# Altium PCB bootleg-4.PcbDoc (part 2 of 2)
Units mm, origin at the board's own origin, x right, y up, seen from the top; angles counter-clockwise.
Board outline 284.8 x 94.3 mm, 2 copper layers (Component Side, Bottom Layer), stack 1.571 mm thick; 140 components, 94 nets, 601 pads, 29 vias.
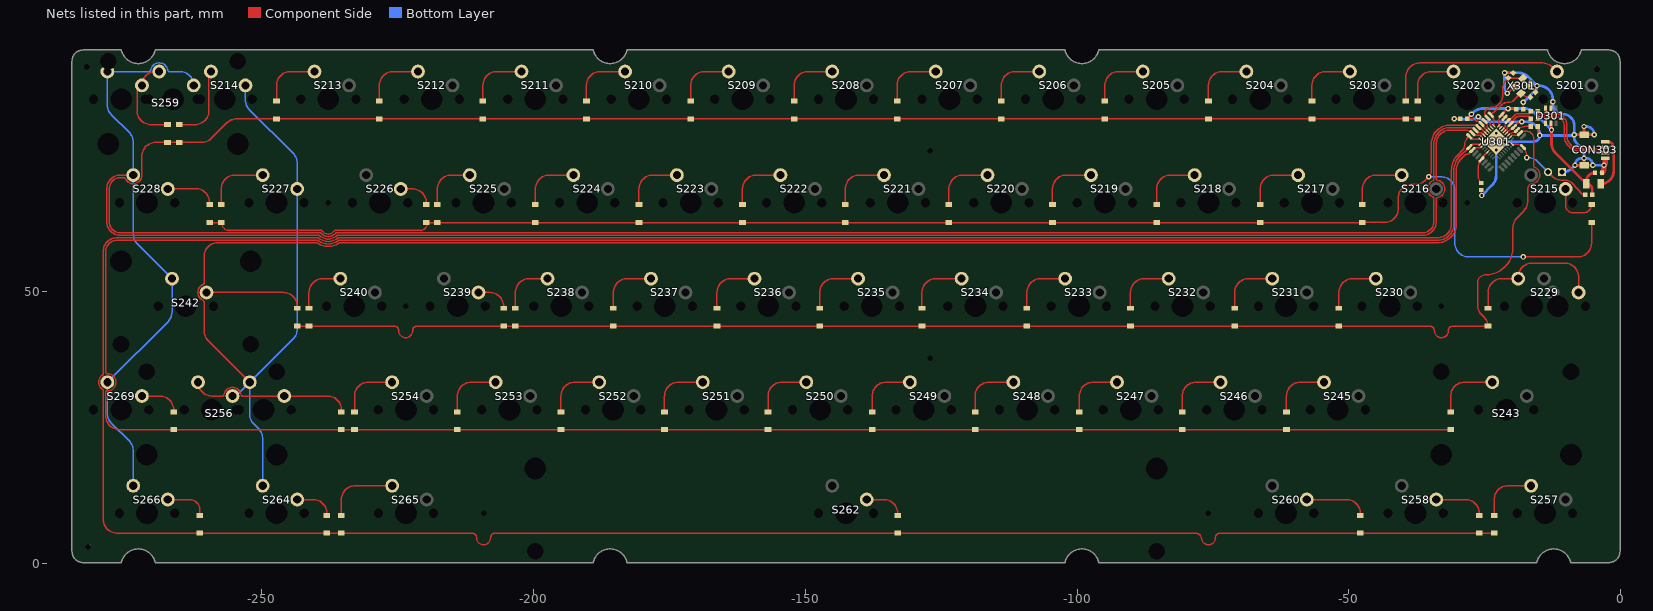
[diagram p2: the nets of this part, all layers, seen from the top]

## Via types
v1: diameter 1, hole 0.5, Component Side to Bottom Layer, tented both sides, 24 vias
v2: diameter 1, hole 0.5, Component Side to Bottom Layer, tented bottom, 5 vias

## Nets (pads, with @x,y where several pads share a name; then routed paths per layer and width w, separated by ;. In a path a pad name is that pad's centre, name@x,y a point inside that pad or via, vN(x,y) a via of type N, cw(c..) or ccw(c..) an arc to the next point about the centre after c; other vN are vias at no path point) (continued)
col14: S214.2 S227.2 S256.2 S264.2 U301.10 | length 364.4
  Component Side w0.254: S256.2@-252.195,33.345 -259.86,41.01 cw(c-258.064,42.806) -260.604,42.806 -260.604,48.148 ccw(c-260.858,48.149) -260.759,48.383 cw(c-260.14,49.855) -260.759,51.327 ccw(c-260.858,51.561) -260.604,51.562 -260.604,56.464 cw(c-258.064,56.464) -258.064,59.004 -239.936,59.004 cw(c-239.935,58.75) -239.789,58.958 ccw(c-237.75,61.865) -235.711,58.958 cw(c-235.565,58.75) -235.564,59.004 -33.655,59.004 ccw(c-33.655,62.452) -30.207,62.452 -30.207,72.357 cw(c-27.213,72.357) -29.331,74.473 -28.705,75.1 cw(c-28.194,74.589) -28.194,75.311 ccw(c-28.194,75.77) -27.869,75.446 U301.10@-27.27,76.045 -26.861,76.454 -25.8,76.454 U301.10@-25.467,76.787
  Bottom Layer w0.254: S256.2@-255.37,30.805 ccw(c-255.37,32.338) -254.286,31.254 S256.2@-252.222,33.318 ; S214.2@-252.99,87.955 -252.99,85.259 ccw(c-250.45,85.259) -252.246,83.463 -244.209,75.426 cw(c-246.005,73.63) -243.465,73.63 S227.2@-243.465,68.905 -243.465,43.132 cw(c-246.005,43.132) -244.209,41.336 S256.2@-252.2,33.345 ; S256.2@-252.222,33.345 S256.2@-252.222,33.318 ; S256.2@-252.195,33.345 S256.2@-252.222,33.318 ; S264.2@-249.809,14.295 -249.809,22.951 ccw(c-252.349,22.951) -250.553,24.747 -251.478,25.672 cw(c-249.682,27.468) -252.222,27.468 S256.2@-252.222,33.318
col15: S228.2 S242.1 S259.2 S266.2 S269.2 U301.7 | length 392.8
  Component Side w0.254: S228.2@-273.627,71.445 -275.971,71.445 ccw(c-275.971,68.905) -278.511,68.905 -278.511,62.906 ccw(c-275.971,62.906) -275.971,60.366 -239.453,60.366 cw(c-239.452,60.112) -239.275,60.294 ccw(c-237.75,61.865) -236.225,60.294 cw(c-236.048,60.112) -236.047,60.366 -36.449,60.366 ccw(c-36.449,62.906) -33.909,62.906 -33.909,66.675 -33.909,67.072 cw(c-33.655,67.072) -33.691,67.324 ccw(c-33.915,68.905) -33.691,70.486 cw(c-33.655,70.738) -33.909,70.738 -33.909,74.295 -33.909,77.176 cw(c-31.369,77.176) -31.369,79.716 -28.623,79.716 cw(c-28.623,77.803) U301.7@-27.27,79.156 -26.908,78.794 -25.835,78.794 -25.467,78.426 U301.7@-25.467,78.413
  Bottom Layer w0.254: S259.2@-278.39,90.495 -278.39,84.37 ccw(c-275.85,84.37) -277.646,82.574 -274.371,79.299 cw(c-276.167,77.503) -273.627,77.503 S228.2@-273.627,71.445 -273.627,60.585 ccw(c-271.087,60.585) -272.884,58.789 S242.1@-266.49,52.395 -266.49,46.297 cw(c-269.03,46.297) -267.234,44.501 S269.2@-278.39,33.345 -278.39,27.601 ccw(c-275.85,27.601) -277.646,25.805 -274.371,22.53 cw(c-276.167,20.734) -273.627,20.734 S266.2@-273.627,14.295 ; S259.2@-278.384,90.495 -270.694,90.495 ccw(c-270.692,90.749) -270.691,90.495 ccw(c-270.692,90.749) -270.441,90.714 cw(c-268.859,90.495) -267.277,90.714 ccw(c-267.026,90.749) -267.026,90.495 -265.049,90.495 cw(c-265.049,87.955) S259.2@-262.509,87.955
D_N: CON303.2 D301.3 R305.2 | length 18.4
  Component Side w0.254: R305.2@-15.225,83.185 ccw(c-14.666,83.185) -14.666,82.626 -13.843,82.626 ; D301.3@-13.777,83.755 -13.777,82.786 cw(c-14.002,82.786) -13.843,82.626 ; CON303.2@-2.794,76.565 -3.077,76.565 ccw(c-3.077,76.102) -3.405,76.429 cw(c-3.732,76.757) -3.732,76.294 -7.366,76.294 cw(c-7.366,78.834) -9.906,78.834 -9.906,80.784 ccw(c-11.749,80.784) -11.749,82.626 -13.843,82.626
D_P: CON303.3 D301.4 R306.2 | length 18.3
  Component Side w0.254: R306.2@-15.225,81.788 cw(c-14.844,81.788) -14.844,82.169 -13.843,82.169 ; D301.4@-13.777,81.005 -13.777,82.01 ccw(c-14.002,82.01) -13.843,82.169 ; CON303.3@-2.794,75.565 -3.077,75.565 cw(c-3.077,76.028) -3.405,75.701 ccw(c-3.732,75.373) -3.732,75.836 -4.191,75.836 -6.604,75.836 -7.366,75.836 cw(c-7.366,78.834) -10.363,78.834 -10.363,80.594 ccw(c-11.938,80.594) -11.938,82.169 -13.843,82.169
D_PRE_N: R305.1 U301.30 | length 6.9
  Component Side w0.254: U301.30@-21.719,79.828 -21.336,80.211 ccw(c-21.644,80.518) -21.209,80.518 cw(c-20.107,80.518) -20.886,81.297 U301.30@-20.765,81.419 ccw(c-20.765,81.994) -20.358,81.587 -19.667,82.278 -19.665,82.278 -19.446,82.497 cw(c-18.919,81.969) -18.919,82.715 -16.995,82.715 ccw(c-16.995,83.185) R305.1@-16.525,83.185
D_PRE_P: R306.1 U301.29 | length 6.5
  Component Side w0.254: U301.29@-21.366,79.474 -20.887,79.953 ccw(c-21.06,80.125) -20.816,80.125 cw(c-20.548,80.125) -20.738,80.314 U301.29@-20.199,80.853 cw(c-19.614,80.853) -20.028,81.267 -19.476,81.819 -19.476,81.821 -19.257,82.039 cw(c-18.729,81.512) -18.729,82.258 -16.995,82.258 cw(c-16.995,81.788) R306.1@-16.525,81.788
GND: C301.1 C302.1 C303.1 C304.1 C305.1 C306.1 CON302.1 CON303.4 CON303.5 D301.2 R302.2 U301.3 U301.28 X301.2 X301.4 | length 129.9
  Component Side w0.254: v1(-30.607,81.788) C302.1@-29.479,81.788 ; v1(-26.162,82.169) -25.758,82.169 U301.3@-25.007,81.419 -24.961,81.372 cw(c-26.047,80.286) -24.769,81.139 cw(c-26.047,80.286) -24.671,80.968 cw(c-26.047,80.286) -24.511,80.286 U301.3@-24.053,79.828 ; R302.2@-25.654,68.692 -25.654,67.998 ccw(c-25.22,67.998) v1(-25.527,67.691) ; v2(-22.886,77.6) U301.28@-22.533,77.6 ; v1(-21.336,90.297) ccw(c-21.219,90.414) -21.219,90.249 C305.1@-19.733,90.249 ; U301.28@-21.012,79.121 -19.845,80.287 U301.28@-19.633,80.287 -18.98,80.941 cw(c-18.161,80.122) v1(-18.161,81.28) ; v1(-20.828,86.487) ccw(c-20.828,86.651) -20.712,86.535 X301.4@-19.54,87.707 ; v1(-17.907,84.836) -17.907,83.602 ccw(c-17.856,83.602) C303.1@-17.892,83.566 ; X301.2@-16.631,88.392 -16.123,87.884 v1(-15.367,87.884) -15.367,86.995 cw(c-15.669,86.995) C306.1@-15.669,86.693 ; C301.1@-15.225,80.391 -15.225,79.624 ccw(c-13.975,79.624) v1(-14.859,78.74) ; D301.2@-12.827,83.755 -12.827,84.043 cw(c-11.526,84.043) v1(-12.446,84.963) ; CON303.5@-6.731,73.415 ccw(c-6.519,73.415) -6.682,73.279 ccw(c-6.519,73.415) CON303.5@-6.669,73.265 ; CON303.5@-6.731,79.015 ccw(c-6.374,79.371) -6.374,78.867 -6.667,78.867 CON303.5@-6.669,78.865
  Component Side w0.5: v1(-8.509,78.867) CON303.5@-6.671,78.867 ; v1(-8.382,73.279) -6.682,73.279 -6.669,73.279 CON303.5@-6.669,73.265 ; CON303.5@-6.815,73.265 CON303.5@-6.669,73.265 ; CON303.5@-6.731,73.415 v1(-6.731,74.549) ; v1(-6.731,80.391) -6.731,79.015 ccw(c-6.519,79.015) CON303.5@-6.671,78.867 ; CON303.5@-6.374,78.867 v1(-4.826,78.867) ; v1(-5.08,73.279) cw(c-5.114,73.313) -5.114,73.265 CON303.5@-6.669,73.265 ; CON303.5@-6.671,78.867 ccw(c-6.519,79.015) CON303.5@-6.669,78.865 -6.669,78.867 CON303.5@-6.671,78.867
  Component Side w1: C304.1@-3.414,71.882 ccw(c-4.298,72.766) -3.048,72.766 v1(-3.048,73.279) ccw(c-3.661,73.892) -2.794,73.892 CON303.4@-2.794,74.295
  Bottom Layer w0.5: v1(-30.607,81.788) -27.465,81.679 ccw(c-27.432,82.629) -27.034,81.766 v1(-26.162,82.169) -26.017,82.024 ccw(c-24.221,83.82) -24.221,81.28 v1(-18.161,81.28) -17.399,81.28 cw(c-17.399,78.74) v1(-14.859,78.74) ; v1(-25.527,67.691) -23.63,69.588 ccw(c-25.426,71.384) -22.886,71.384 v2(-22.886,76.045) v2(-22.886,77.6) ; v2(-24.442,77.6) v2(-22.886,77.6) ; v2(-22.886,79.156) v2(-22.886,77.6) ; v1(-20.828,86.487) cw(c-19.602,87.713) -21.336,87.713 v1(-21.336,90.297) -18.832,90.297 cw(c-18.832,87.757) -17.036,89.553 v1(-15.367,87.884) ; v1@-18.125,84.836 v1(-17.907,84.836) -15.726,87.017 ccw(c-16.593,87.884) v1(-15.367,87.884) ; CON302.1@-10.795,72.009 -10.704,72.009 ccw(c-10.704,74.549) -8.908,72.753 v1(-8.382,73.279) cw(c-7.112,73.279) -7.112,74.549 v1(-6.731,74.549) ; v1@-8.573,79.149 v1@-8.573,78.642 ; v1(-6.731,80.391) -6.35,80.391 cw(c-6.35,78.867) v1(-4.826,78.867) -8.348,78.867 ccw(c-8.348,78.642) v1@-8.509,78.8 ; v1(-3.048,73.279) v1(-5.08,73.279) ccw(c-6.35,73.279) -6.35,74.549 v1(-6.731,74.549) ; v2(-22.886,77.6) v2(-21.33,77.6) -15.999,77.6 ccw(c-15.999,78.74) v1(-14.859,78.74) ; v1(-15.367,87.884) -14.986,87.884 cw(c-14.986,85.344) -12.446,85.344 v1@-12.446,85.217 ; v1(-14.859,78.74) -9.271,78.74 cw(c-9.271,76.2) v1@-8.573,78.642 ; v1(-12.446,84.963) -12.446,85.22 cw(c-14.351,85.217) v1@-12.446,85.217 ; v1(-12.446,84.963) v1@-12.446,85.217 ; v1(-12.446,84.963) -12.446,84.455 ccw(c-10.668,84.455) -11.103,82.731 ccw(c-10.668,84.455) -10.668,82.677 cw(c-10.668,80.518) -8.509,80.518 v1(-8.509,78.867) v1@-8.509,78.8 ; v1@-8.573,78.642 cw(c-8.348,78.642) v1@-8.509,78.8 ; v1@-8.573,78.642 cw(c-9.271,76.2) -8.509,78.623 v1@-8.509,78.8 ; v1@-8.573,78.642 ccw(c-6.511,78.642) -7.969,77.184 -6.985,76.2 cw(c-7.598,75.587) -6.731,75.587 v1(-6.731,74.549)
NetC301_2: C301.2 U301.27 | length 4.6
  Component Side w0.254: U301.27@-20.659,78.767 -20.501,78.925 cw(c-19.414,77.839) -19.414,79.375 U301.27@-19.068,79.722 cw(c-17.452,78.105) -17.452,80.391 C301.2@-16.525,80.391
NetC305_2: C305.2 U301.2 X301.3 | length 14.6
  Component Side w0.254: U301.2@-23.699,80.181 -24.01,80.492 -24.01,80.942 ccw(c-25.484,80.942) U301.2@-24.442,81.984 -24.848,82.39 cw(c-24.434,82.804) -25.019,82.804 cw(c-24.099,82.804) -24.75,83.454 -24.638,83.566 cw(c-23.844,82.772) -23.844,83.895 -23.308,83.895 ccw(c-23.308,84.558) -22.891,84.043 ccw(c-23.308,84.558) -22.839,84.089 -22.414,84.472 ccw(c-23.12,85.415) -22.195,84.685 ccw(c-23.349,85.84) -21.717,85.84 -21.717,87.213 cw(c-19.177,87.213) -20.973,89.009 C305.2@-20.653,89.329 ccw(c-20.492,89.49) -20.492,89.263 X301.3@-17.984,89.263
NetC306_2: C306.2 U301.1 X301.1 | length 12.6
  Component Side w0.254: U301.1@-23.346,80.535 -23.346,81.27 ; C306.2@-16.589,85.773 cw(c-16.589,88.23) -18.325,86.493 X301.1@-18.338,86.505 -19.516,85.327 cw(c-20.701,86.512) -20.701,84.836 ccw(c-20.701,83.169) -21.761,84.456 ccw(c-20.701,83.169) -21.88,84.348 ccw(c-21.701,84.167) -21.882,84.345 -21.961,84.266 cw(c-23.12,85.415) -21.992,84.235 cw(c-23.12,85.415) -21.994,84.233 cw(c-23.12,85.415) -22.032,84.198 U301.1@-23.876,82.55 ; U301.1@-23.876,82.55 cw(c-25.156,81.27) -23.346,81.27 ; U301.1@-23.876,82.55 -23.346,82.02 -23.346,81.27
NetD201_1: D201.1 S201.1 | length 34.3
  Component Side w0.254: D201.1@-39.497,85.05 -39.497,88.409 -39.497,89.535 cw(c-36.957,89.535) -36.957,92.075 -30.988,92.075 -30.904,92.084 cw(c-30.74,90.495) -30.745,92.092 -20.071,92.14 cw(c-20.066,91.313) -20.056,92.14 -14.325,92.075 ccw(c-14.322,92.329) -14.322,92.075 cw(c-14.322,89.535) -12.526,91.331 S201.1@-11.69,90.495
NetD202_1: D202.1 S202.1 | length 11
  Component Side w0.254: D202.1@-37.338,85.05 -37.338,87.955 cw(c-34.798,87.955) -34.798,90.495 S202.1@-30.74,90.495
NetD203_1: D203.1 S203.1 | length 11.3
  Component Side w0.254: D203.1@-56.769,85.05 -56.769,87.955 cw(c-54.229,87.955) -54.229,90.495 S203.1@-49.79,90.495
NetD204_1: D204.1 S204.1 | length 11.3
  Component Side w0.254: D204.1@-75.819,85.05 -75.819,87.955 cw(c-73.279,87.955) -73.279,90.495 S204.1@-68.84,90.495
NetD205_1: D205.1 S205.1 | length 11.3
  Component Side w0.254: D205.1@-94.869,85.05 -94.869,87.955 cw(c-92.329,87.955) -92.329,90.495 S205.1@-87.89,90.495
NetD206_1: D206.1 S206.1 | length 11.3
  Component Side w0.254: D206.1@-113.919,85.05 -113.919,87.955 cw(c-111.379,87.955) -111.379,90.495 S206.1@-106.94,90.495
NetD207_1: D207.1 S207.1 | length 11.5
  Component Side w0.254: D207.1@-133.096,85.05 -133.096,87.955 cw(c-130.556,87.955) -130.556,90.495 S207.1@-125.99,90.495
NetD208_1: D208.1 S208.1 | length 11.3
  Component Side w0.254: D208.1@-152.019,85.05 -152.019,87.955 cw(c-149.479,87.955) -149.479,90.495 S208.1@-145.04,90.495
NetD209_1: D209.1 S209.1 | length 11.3
  Component Side w0.254: D209.1@-171.069,85.05 -171.069,87.955 cw(c-168.529,87.955) -168.529,90.495 S209.1@-164.09,90.495
NetD210_1: D210.1 S210.1 | length 11.5
  Component Side w0.254: D210.1@-190.246,85.05 -190.246,87.955 cw(c-187.706,87.955) -187.706,90.495 S210.1@-183.14,90.495
NetD211_1: D211.1 S211.1 | length 11.5
  Component Side w0.254: D211.1@-209.296,85.05 -209.296,87.955 cw(c-206.756,87.955) -206.756,90.495 S211.1@-202.19,90.495
NetD212_1: D212.1 S212.1 | length 11.5
  Component Side w0.254: D212.1@-228.346,85.05 -228.346,87.955 cw(c-225.806,87.955) -225.806,90.495 S212.1@-221.24,90.495
NetD213_1: D213.1 S213.1 | length 11.3
  Component Side w0.254: D213.1@-247.269,85.05 -247.269,87.955 cw(c-244.729,87.955) -244.729,90.495 S213.1@-240.29,90.495
NetD214_1: D214.1 S214.1 | length 14.3
  Component Side w0.254: D214.1@-265.176,80.732 -262.255,80.732 ccw(c-262.255,83.272) -259.715,83.272 -259.715,90.12 cw(c-259.34,90.12) S214.1@-259.34,90.495
NetD215_1: D215.1 S215.1 | length 9.4
  Component Side w0.254: S215.1@-10.102,68.905 -10.102,65.855 ccw(c-8.763,65.855) -8.763,64.516 -6.818,64.516 ccw(c-6.818,66) D215.1@-5.334,66
NetD216_1: D216.1 S216.1 | length 11.6
  Component Side w0.254: D216.1@-47.498,66 -47.498,68.905 cw(c-44.958,68.905) -44.958,71.445 S216.1@-40.265,71.445
NetD217_1: D217.1 S217.1 | length 11.3
  Component Side w0.254: D217.1@-66.294,66 -66.294,68.905 cw(c-63.754,68.905) -63.754,71.445 S217.1@-59.315,71.445
NetD218_1: D218.1 S218.1 | length 11.3
  Component Side w0.254: D218.1@-85.344,66 -85.344,68.905 cw(c-82.804,68.905) -82.804,71.445 S218.1@-78.365,71.445
NetD219_1: D219.1 S219.1 | length 11.5
  Component Side w0.254: D219.1@-104.521,66 -104.521,68.905 cw(c-101.981,68.905) -101.981,71.445 S219.1@-97.415,71.445
NetD220_1: D220.1 S220.1 | length 12.2
  Component Side w0.254: D220.1@-123.571,66 -123.571,68.905 cw(c-121.031,68.905) -121.031,71.445 S220.1@-116.465,71.445 S220.1@-116.967,70.943
NetD221_1: D221.1 S221.1 | length 11.5
  Component Side w0.254: D221.1@-142.621,66 -142.621,68.905 cw(c-140.081,68.905) -140.081,71.445 S221.1@-135.515,71.445
NetD222_1: D222.1 S222.1 | length 11.3
  Component Side w0.254: D222.1@-161.544,66 -161.544,68.905 cw(c-159.004,68.905) -159.004,71.445 S222.1@-154.565,71.445
NetD223_1: D223.1 S223.1 | length 11.3
  Component Side w0.254: D223.1@-180.594,66 -180.594,68.905 cw(c-178.054,68.905) -178.054,71.445 S223.1@-173.615,71.445
NetD224_1: D224.1 S224.1 | length 11.3
  Component Side w0.254: D224.1@-199.644,66 -199.644,68.905 cw(c-197.104,68.905) -197.104,71.445 S224.1@-192.665,71.445
NetD225_1: D225.1 S225.1 | length 10.3
  Component Side w0.254: D225.1@-217.678,66 -217.678,68.905 cw(c-215.138,68.905) -215.138,71.445 S225.1@-211.715,71.445
NetD226_1: D226.1 S226.1 | length 6.5
  Component Side w0.254: S226.1@-224.415,68.905 -222.25,68.905 cw(c-222.25,66.365) -219.71,66.365 D226.1@-219.71,66
NetD227_1: D227.1 S227.1 | length 12.7
  Component Side w0.254: D227.1@-257.429,66 -257.429,68.905 cw(c-254.889,68.905) -254.889,71.445 S227.1@-249.815,71.445 S227.1@-250.317,70.943
NetD228_1: D228.1 S228.1 | length 10.5
  Component Side w0.254: S228.1@-267.589,68.961 -262.128,68.961 cw(c-262.128,66.421) -259.588,66.421 D228.1@-259.588,66
  Bottom Layer w0.254: S228.1@-267.734,68.448 S228.1@-267.277,68.905
NetD229_1: D229.1 S229.1 | length 27.1
  Component Side w0.254: D229.1@-24.384,46.95 -24.384,49.855 cw(c-21.844,49.855) -21.844,52.395 S229.1@-18.834,52.395 -18.834,52.705 cw(c-16.294,52.705) -16.294,55.245 -10.261,55.245 cw(c-10.261,52.705) -7.721,52.705 S229.1@-7.721,49.855
NetD230_1: D230.1 S230.1 | length 11.1
  Component Side w0.254: D230.1@-51.816,46.95 -51.816,49.855 cw(c-49.276,49.855) -49.276,52.395 S230.1@-45.027,52.395
NetD231_1: D231.1 S231.1 | length 11.3
  Component Side w0.254: D231.1@-70.993,46.95 -70.993,49.855 cw(c-68.453,49.855) -68.453,52.395 S231.1@-64.077,52.395
NetD232_1: D232.1 S232.1 | length 11.4
  Component Side w0.254: D232.1@-90.17,46.95 -90.17,49.855 cw(c-87.63,49.855) -87.63,52.395 S232.1@-83.127,52.395
NetD233_1: D233.1 S233.1 | length 11.4
  Component Side w0.254: D233.1@-109.22,46.95 -109.22,49.855 cw(c-106.68,49.855) -106.68,52.395 S233.1@-102.177,52.395
NetD234_1: D234.1 S234.1 | length 12.5
  Component Side w0.254: D234.1@-128.524,46.95 -128.524,49.855 cw(c-125.984,49.855) -125.984,52.395 S234.1@-121.227,52.395
  Bottom Layer w0.254: S234.1@-121.793,51.83 S234.1@-121.227,52.395
NetD235_1: D235.1 S235.1 | length 11.4
  Component Side w0.254: D235.1@-147.32,46.95 -147.32,49.855 cw(c-144.78,49.855) -144.78,52.395 S235.1@-140.277,52.395
NetD236_1: D236.1 S236.1 | length 11.3
  Component Side w0.254: D236.1@-166.243,46.95 -166.243,49.855 cw(c-163.703,49.855) -163.703,52.395 S236.1@-159.327,52.395
NetD237_1: D237.1 S237.1 | length 11.3
  Component Side w0.254: D237.1@-185.293,46.95 -185.293,49.855 cw(c-182.753,49.855) -182.753,52.395 S237.1@-178.377,52.395
NetD238_1: D238.1 S238.1 | length 10.3
  Component Side w0.254: D238.1@-203.327,46.95 -203.327,49.855 cw(c-200.787,49.855) -200.787,52.395 S238.1@-197.427,52.395
NetD239_1: D239.1 S239.1 | length 6.5
  Component Side w0.254: S239.1@-210.127,49.855 -208.026,49.855 cw(c-208.026,47.315) -205.486,47.315 D239.1@-205.486,46.95
NetD240_1: D240.1 S240.1 | length 10.1
  Component Side w0.254: D240.1@-241.3,46.95 -241.3,49.855 cw(c-238.76,49.855) -238.76,52.395 S240.1@-235.527,52.395
NetD242_1: D242.1 S242.2 | length 18.5
  Component Side w0.254: S242.2@-260.14,49.855 -245.999,49.855 cw(c-245.999,47.315) -243.459,47.315 D242.1@-243.459,46.95
NetD243_1: D243.1 S243.2 | length 12
  Component Side w0.254: D243.1@-31.242,27.9 -31.242,30.805 cw(c-28.702,30.805) -28.702,33.345 S243.2@-23.596,33.345
NetD245_1: D245.1 S245.1 | length 11.3
  Component Side w0.254: D245.1@-61.468,27.9 -61.468,30.805 cw(c-58.928,30.805) -58.928,33.345 S245.1@-54.552,33.345
NetD246_1: D246.1 S246.1 | length 12.4
  Component Side w0.254: D246.1@-80.645,27.9 -80.645,30.805 cw(c-78.105,30.805) -78.105,33.345 S246.1@-73.602,33.345 S246.1@-74.295,32.652
NetD247_1: D247.1 S247.1 | length 11.3
  Component Side w0.254: D247.1@-99.568,27.9 -99.568,30.805 cw(c-97.028,30.805) -97.028,33.345 S247.1@-92.652,33.345
NetD248_1: D248.1 S248.1 | length 11.4
  Component Side w0.254: D248.1@-118.745,27.9 -118.745,30.805 cw(c-116.205,30.805) -116.205,33.345 S248.1@-111.702,33.345
NetD249_1: D249.1 S249.1 | length 11.3
  Component Side w0.254: D249.1@-137.668,27.9 -137.668,30.805 cw(c-135.128,30.805) -135.128,33.345 S249.1@-130.752,33.345
NetD250_1: D250.1 S250.1 | length 11.4
  Component Side w0.254: D250.1@-156.845,27.9 -156.845,30.805 cw(c-154.305,30.805) -154.305,33.345 S250.1@-149.802,33.345
NetD251_1: D251.1 S251.1 | length 11.4
  Component Side w0.254: D251.1@-175.895,27.9 -175.895,30.805 cw(c-173.355,30.805) -173.355,33.345 S251.1@-168.852,33.345
NetD252_1: D252.1 S252.1 | length 11.4
  Component Side w0.254: D252.1@-194.945,27.9 -194.945,30.805 cw(c-192.405,30.805) -192.405,33.345 S252.1@-187.902,33.345
NetD253_1: D253.1 S253.1 | length 11.4
  Component Side w0.254: D253.1@-213.995,27.9 -213.995,30.805 cw(c-211.455,30.805) -211.455,33.345 S253.1@-206.952,33.345
NetD254_1: D254.1 S254.1 | length 11.3
  Component Side w0.254: D254.1@-232.918,27.9 -232.918,30.805 cw(c-230.378,30.805) -230.378,33.345 S254.1@-226.002,33.345
NetD256_1: D256.1 S256.1 | length 31.3
  Component Side w0.254: S256.1@-261.72,33.345 ccw(c-259.18,33.345) -259.18,30.805 -257.203,30.805 ccw(c-257.203,31.059) -256.952,31.024 cw(c-255.37,30.805) -253.788,31.024 ccw(c-253.537,31.059) -253.537,30.805 S256.1@-245.845,30.805 -237.871,30.805 cw(c-237.871,28.265) -235.331,28.265 D256.1@-235.331,27.9
NetD257_1: D257.1 S257.1 | length 11.1
  Component Side w0.254: D257.1@-23.241,8.85 -23.241,11.755 cw(c-20.701,11.755) -20.701,14.295 S257.1@-16.452,14.295
NetD258_1: D258.1 S258.1 | length 9.7
  Component Side w0.254: S258.1@-33.909,11.755 -31.528,11.755 -28.54,11.755 cw(c-28.54,9.215) -26,9.215 D258.1@-26,8.85
NetD259_1: D259.1 S259.1 | length 17.8
  Component Side w0.254: S259.1@-268.859,90.495 -269.494,90.495 ccw(c-269.494,87.955) S259.1@-272.034,87.955 ccw(c-272.034,87.066) -272.923,87.066 -272.923,83.272 ccw(c-270.383,83.272) -270.383,80.732 D259.1@-267.335,80.732
  Bottom Layer w0.254: S259.1@-272.04,87.955 S259.1@-271.349,88.646
NetD260_1: D260.1 S260.1 | length 11.7
  Component Side w0.254: S260.1@-57.727,11.755 -50.419,11.755 cw(c-50.419,9.215) -47.879,9.215 D260.1@-47.879,8.85
NetD262_1: D262.1 S262.1 | length 7.5
  Component Side w0.254: S262.1@-138.69,11.755 -135.54,11.755 cw(c-135.54,9.215) -133,9.215 D262.1@-133,8.85
NetD264_1: D264.1 S264.1 | length 7.3
  Component Side w0.254: S264.1@-243.459,11.755 -240.54,11.755 cw(c-240.54,9.215) -238,9.215 D264.1@-238,8.85
NetD265_1: D265.1 S265.1 | length 13.7
  Component Side w0.254: D265.1@-235.331,8.85 -235.331,11.755 cw(c-232.791,11.755) -232.791,14.295 S265.1@-225.99,14.295
NetD266_1: D266.1 S266.1 | length 8
  Component Side w0.254: S266.1@-267.277,11.755 -263.256,11.755 cw(c-263.256,9.865) -261.366,9.865 D266.1@-261.366,8.85
NetD269_1: D269.1 S269.1 | length 7.7
  Component Side w0.254: S269.1@-272.04,30.805 -268.732,30.805 cw(c-268.732,28.265) -266.192,28.265 D269.1@-266.192,27.9
NetR302_1: R302.1 U301.13 | length 6.5
  Component Side w0.254: R302.1@-25.654,69.992 cw(c-24.428,71.218) -26.162,71.218 -26.162,72.926 cw(c-24.151,72.926) U301.13@-25.573,74.348 -25.573,74.503 cw(c-25.436,74.503) -25.533,74.6 U301.13@-24.406,75.726
PC2: D215.2 D216.2 D217.2 D218.2 D219.2 D220.2 D221.2 D222.2 D223.2 D224.2 D225.2 D226.2 D227.2 D228.2 U301.5 | length 297.9
  Component Side w0.254: D228.2@-259.588,62.715 D227.2@-257.683,62.715 ; D227.2@-257.429,62.73 ccw(c-255.973,62.73) -255.973,61.274 ; -256.242,61.274 -255.973,61.274 ; D216.2@-47.498,62.715 -219.456,62.715 cw(c-220.897,62.715) -220.897,61.274 -236.467,61.274 ccw(c-236.469,61.02) -236.681,61.16 cw(c-237.75,61.865) -238.819,61.16 ccw(c-239.031,61.02) -239.033,61.274 -255.973,61.274 ; D216.2@-47.498,62.73 -43.434,62.73 ccw(c-43.434,65.27) -40.894,65.27 -40.894,67.217 cw(c-38.354,67.217) -38.354,69.757 -37.721,69.757 ccw(c-37.721,72.297) -35.925,70.501 v1(-35.306,71.12) ccw(c-36.487,72.301) -34.817,72.301 -34.817,74.295 -34.817,77.176 cw(c-31.369,77.176) -34.752,77.842 cw(c-31.369,77.176) -34.166,79.192 cw(c-31.369,77.176) -31.369,80.624 U301.5@-26.419,80.624 ; U301.5@-26.139,80.287 -25.927,80.287 U301.5@-24.76,79.121 ; v1(-17.907,56.388) -7.874,56.388 ccw(c-7.874,58.928) -5.334,58.928 D215.2@-5.334,62.715
  Bottom Layer w0.254: v1(-35.306,71.12) -33.02,71.12 cw(c-33.02,68.58) -32.605,71.086 cw(c-33.02,68.58) -30.48,68.58 -30.48,58.928 ccw(c-27.94,58.928) -27.94,56.388 v1(-17.907,56.388)
PC4: D229.2 D230.2 D231.2 D232.2 D233.2 D234.2 D235.2 D236.2 D237.2 D238.2 D239.2 D240.2 D242.2 U301.26 | length 271.1
  Component Side w0.254: D242.2@-243.459,43.68 D240.2@-241.3,43.68 -225.666,43.68 cw(c-225.666,42.815) -224.801,42.815 ccw(c-223.52,42.815) -222.239,42.815 cw(c-221.374,42.815) -221.374,43.68 D239.2@-205.486,43.68 ; D239.2@-205.486,43.665 D230.2@-51.816,43.665 ; D230.2@-51.816,43.68 -35.152,43.68 cw(c-35.152,42.77) -34.244,42.832 cw(c-35.152,42.77) -34.242,42.77 ccw(c-32.962,42.815) -31.681,42.815 cw(c-30.816,42.815) -30.816,43.68 -24.697,43.68 cw(c-24.697,43.366) -24.384,43.366 D229.2@-24.384,43.68 ccw(c-26.55,43.68) -25.018,45.211 -25.545,45.738 cw(c-23.749,47.534) -26.289,47.534 -26.289,51.629 cw(c-24.816,51.629) -24.816,53.102 ccw(c-24.816,58.125) -22.825,53.513 ccw(c-24.816,58.125) -21.541,54.317 ; -21.54,54.317 ccw(c-24.816,58.125) -21.069,54.78 ; -21.024,54.83 ccw(c-24.816,58.125) -19.984,56.752 -19.894,57.07 -19.846,57.398 ccw(c-24.816,58.125) -19.793,58.125 -19.793,61.832 cw(c-17.253,61.832) -19.049,63.628 -17.855,64.822 ccw(c-19.651,66.618) -17.148,66.188 ccw(c-19.651,66.618) -17.111,66.618 -17.111,68.771 cw(c-15.954,68.771) -16.413,69.833 cw(c-16.313,69.599) -16.332,69.853 ccw(c-16.452,71.445) -15.954,69.928 ccw(c-16.452,71.445) -15.833,72.917 cw(c-15.735,73.151) -15.835,72.918 cw(c-15.735,73.151) -15.842,72.921 cw(c-15.735,73.151) -15.98,73.086 cw(c-15.604,73.188) -15.994,73.188 -15.994,73.532 -15.991,74.671 ccw(c-17.272,74.676) -15.991,74.681 -15.998,78.219 ccw(c-17.272,78.219) -17.272,79.493 -17.689,79.493 ccw(c-17.689,78.343) U301.26@-18.502,79.156 -18.918,78.74 -19.979,78.74 U301.26@-20.305,78.413
PD0: D201.2 D202.2 D203.2 D204.2 D205.2 D206.2 D207.2 D208.2 D209.2 D210.2 D211.2 D212.2 D213.2 D214.2 D259.2 U301.6 | length 529.2
  Component Side w0.254: -272.117,70.927 cw(c-273.627,71.445) -275.103,70.834 ccw(c-275.338,70.737) -275.339,70.991 -275.971,70.991 ccw(c-275.971,68.905) -277.32,70.496 ccw(c-275.517,68.707) -278.057,68.707 -278.057,62.906 ccw(c-275.971,62.906) -278.038,62.624 ccw(c-275.971,62.906) -275.971,60.82 -270.002,60.82 -239.257,60.82 cw(c-239.256,60.566) -239.064,60.732 ccw(c-237.75,61.865) -236.436,60.732 cw(c-236.244,60.566) -236.243,60.82 -36.449,60.82 ccw(c-36.449,62.906) -34.574,61.991 ; -272.117,70.928 ccw(c-273.627,71.445) -272.041,71.627 -272.041,74.922 cw(c-269.501,74.922) -269.501,77.462 D259.2@-267.335,77.462 D214.2@-265.176,77.462 -261.029,77.462 ccw(c-261.029,80.002) -259.233,78.206 -256.403,81.036 cw(c-254.607,79.24) -254.607,81.78 D213.2@-247.269,81.78 D212.2@-228.346,81.78 D211.2@-209.296,81.78 D210.2@-190.246,81.78 D209.2@-171.069,81.78 D208.2@-152.019,81.78 D207.2@-133.096,81.78 D206.2@-113.919,81.78 D205.2@-94.869,81.78 D204.2@-75.819,81.78 D203.2@-56.769,81.78 D201.2@-39.497,81.78 D202.2@-37.338,81.78 ; -34.677,61.805 ccw(c-36.449,62.906) -34.363,62.906 -34.363,66.421 -34.363,67.072 cw(c-33.655,67.072) -34.358,67.158 ccw(c-34.61,67.189) -34.515,67.425 cw(c-33.915,68.905) -34.515,70.385 ccw(c-34.61,70.621) -34.358,70.652 cw(c-33.655,70.738) -34.363,70.738 -34.363,77.176 cw(c-31.369,77.176) -34.345,77.504 cw(c-31.369,77.176) -31.369,80.17 -27.787,80.17 cw(c-27.787,78.639) U301.6@-26.704,79.722 -26.231,79.248 -25.594,79.248 U301.6@-25.113,78.767
PD2: D257.2 D258.2 D260.2 D262.2 D264.2 D265.2 D266.2 U301.8 | length 582.9
  Component Side w0.254: -77.072,4.449 ccw(c-78.203,4.449) -77.1,4.698 ; D258.2@-26,5.565 D257.2@-23.241,5.565 ; D258.2@-26,5.58 D260.2@-47.879,5.58 -73.673,5.58 ccw(c-73.673,4.715) -74.538,4.715 cw(c-75.819,4.715) -77.1,4.698 ; U301.8@-25.821,78.06 -27.305,78.06 U301.8@-27.836,78.59 -28.163,78.263 ccw(c-26.862,76.962) -28.702,76.962 cw(c-30.092,76.962) -29.109,75.979 -29.972,75.116 ccw(c-27.213,72.357) -29.973,75.115 ccw(c-27.213,72.357) -31.115,72.357 -31.115,62.452 cw(c-33.655,62.452) -33.655,59.912 -235.872,59.912 ccw(c-235.873,59.658) -236.038,59.851 cw(c-237.75,61.865) -239.462,59.851 ccw(c-239.627,59.658) -239.628,59.912 -276.606,59.912 ccw(c-276.606,57.372) -279.146,57.372 -279.146,34.897 cw(c-279.4,34.896) -279.261,34.683 ccw(c-278.39,33.345) -279.261,32.007 cw(c-279.4,31.794) -279.146,31.793 -279.146,8.12 ccw(c-276.606,8.12) -276.606,5.58 D266.2@-261.366,5.58 D264.2@-238,5.58 D265.2@-235.331,5.58 -211.321,5.58 cw(c-211.321,4.715) -210.456,4.715 ccw(c-209.175,4.715) -207.894,4.715 cw(c-207.029,4.715) -207.029,5.58 D262.2@-133,5.58 -78.203,5.58 cw(c-78.203,4.449) -77.1,4.698
PD3: D243.2 D245.2 D246.2 D247.2 D248.2 D249.2 D250.2 D251.2 D252.2 D253.2 D254.2 D256.2 D269.2 U301.9 | length 550
  Component Side w0.254: D243.2@-31.242,24.63 D245.2@-61.468,24.63 D246.2@-80.645,24.63 D247.2@-99.568,24.63 D248.2@-118.745,24.63 D249.2@-137.668,24.63 D250.2@-156.845,24.63 D251.2@-175.895,24.63 D252.2@-194.945,24.63 D253.2@-213.995,24.63 D254.2@-232.918,24.63 -276.152,24.63 cw(c-276.152,27.17) -278.692,27.17 -278.692,27.813 -278.686,27.813 -278.686,29.073 -278.686,31.494 cw(c-278.432,31.494) -278.427,31.748 ccw(c-278.39,33.345) -278.427,34.942 cw(c-278.432,35.196) -278.686,35.196 -278.686,57.525 cw(c-276.606,57.372) -276.606,59.458 -239.788,59.458 cw(c-239.787,59.204) -239.632,59.406 ccw(c-237.75,61.865) -235.868,59.406 cw(c-235.713,59.204) -235.712,59.458 -33.655,59.458 ccw(c-33.655,62.452) -30.661,62.452 -30.661,72.357 cw(c-27.213,72.357) -29.651,74.795 U301.9@-27.836,76.61 -27.305,77.141 U301.9@-25.821,77.141
RAW: CON303.1 F301.2 | length 10.1
  Component Side w0.5: F301.2@-3.603,69.85 ccw(c-3.603,72.183) -1.27,72.183 -1.27,76.454 ccw(c-2.381,76.454) -1.393,76.962 ccw(c-2.381,76.454) -1.397,76.97 ccw(c-2.381,76.454) -2.381,77.565 CON303.1@-2.794,77.565
RST: CON302.2 R301.2 U301.24 | length 17.6
  Component Side w0.254: U301.24@-19.952,77.141 -19.217,77.141 cw(c-19.217,75.33) U301.24@-17.936,76.61 ; U301.24@-17.936,76.61 cw(c-19.54,75.007) -17.272,75.007 v1(-17.272,74.676) ; CON302.2@-13.335,72.009 -12.57,71.244 ccw(c-10.774,73.04) -10.774,70.5 -10.179,70.5 cw(c-10.102,68.905) -8.944,70.005 cw(c-10.102,68.905) -8.926,69.984 -7.009,67.9 ccw(c-6.822,68.072) -6.822,67.818 R301.2@-6.492,67.818
  Bottom Layer w0.254: v1(-17.272,74.676) -17.054,74.676 cw(c-17.054,72.136) -15.258,73.932 CON302.2@-13.335,72.009
VCC: C302.2 C303.2 C304.2 D301.5 F301.1 R301.1 U301.4 U301.31 U301.32 | length 48.7
  Component Side w0.254: C302.2@-28.179,81.788 -27.41,81.788 cw(c-27.41,80.921) -27.078,81.722 -26.926,81.641 -26.553,81.44 ccw(c-26.162,82.169) -26.167,81.342 cw(c-26.167,81.088) -25.996,81.275 -25.992,81.272 U301.4@-25.573,80.853 -25.573,80.706 -25.019,80.152 -25.019,80.087 U301.4@-24.406,79.474 ; C302.2@-28.113,81.948 v1(-27.432,82.629) ; U301.31@-22.073,80.181 U301.32@-22.426,80.535 -22.426,81.27 cw(c-20.616,81.27) U301.32@-21.896,82.55 ; U301.31@-21.209,82.106 U301.31@-21.33,81.984 U301.32@-21.896,82.55 -20.727,83.719 -19.561,83.719 cw(c-19.561,83.197) C303.2@-19.192,83.566
  Component Side w0.5: C302.2@-28.179,81.788 cw(c-27.952,81.788) C302.2@-28.113,81.948 ; D301.5@-12.827,81.005 -12.827,80.554 ccw(c-10.287,80.554) v1(-12.7,79.756) -12.699,77.298 ccw(c-10.159,77.298) -11.955,75.502 F301.1@-6.56,70.107 ; R301.1@-5.192,67.818 -5.192,68.739 ccw(c-6.303,68.739) F301.1@-6.303,69.85 F301.1@-6.56,70.107 ; C304.2@-4.714,71.882 ccw(c-4.714,70.293) -6.303,70.293 -6.303,70.072 cw(c-6.303,71.026) F301.1@-6.56,70.107
  Bottom Layer w0.5: v1(-27.432,82.629) -27.112,82.949 cw(c-25.316,81.153) -25.316,83.693 v1(-20.701,83.693) -17.689,83.693 cw(c-17.689,81.153) -15.893,82.949 v1(-12.7,79.756)
pads on no net: D301.1 D301.6 S201. S202. S203. S204. S205. S206. S207. S208. S209. S210. S211. S212. S213. S214. S215. S216. S217. S218. S219. S220. S221. S222. S223. S224. S225. S226. S227. S228. S229. S230. S231. S232. S233. S234. S235. S236. S237. S238. S239. S240. S242. S243. S245. S246. S247. S248. S249. S250. S251. S252. S253. S254. S256. S257. S258. S259. S260. S262. S264. S265. S266. S269.
copper on no net: | length 235.7
  Component Side w0.254: -175.641,6.604 -175.641,13.335 ; -175.641,6.604 -152.908,6.604 ; -175.641,6.604 -152.908,6.604 ; -175.641,6.604 -175.641,13.335 ; -175.641,13.335 -152.908,13.335 ; -175.641,13.335 -152.908,13.335 ; -152.908,6.604 -152.908,13.335 ; -152.908,6.604 -152.908,13.335
  Bottom Layer w0.254: -126.873,6.35 -126.873,13.081 ; -126.873,6.35 -104.14,6.35 ; -126.873,6.35 -126.873,13.081 ; -126.873,6.35 -104.14,6.35 ; -126.873,13.081 -104.14,13.081 ; -126.873,13.081 -104.14,13.081 ; -104.14,6.35 -104.14,13.081 ; -104.14,6.35 -104.14,13.081

## Other copper
Component Side:
  text "BOOTLEG-4" at -174.625,9.779 h5
  text "Rev B1" at -174.498,7.62 h2
  text "by 4pplet" at -162.052,7.62 h2
Bottom Layer:
  region net RST: -17.399,74.803
  text "BOOTLEG-4" at -105.156,9.398 h5
  text "Rev B1" at -120.65,7.112 h2
  text "by 4pplet" at -105.283,7.112 h2

## Silkscreen, mask and mechanical layers (free items; w line width, h text height)
Top Overlay:
  text "RESET" at -14.351,73.533 h2
outline:
  lines w0.1: -284.861,36.576 -280.67,36.576 ccw(c-280.67,37.719) -279.527,37.719 -279.527,37.795 ccw(c-280.797,37.795) -280.797,39.065 -284.85,39.065 -284.85,92.415 cw(c-282.85,92.415) -282.85,94.415 -275.85,94.415 ccw(c-272.7,95.149) -269.55,94.415 -189.05,94.415 ccw(c-185.9,95.149) -182.75,94.415 -102.25,94.415 ccw(c-99.1,95.149) -95.95,94.415 -23.553,94.415 ; -284.85,36.565 -284.85,2.215 ccw(c-282.85,2.215) -282.85,0.215 -275.85,0.215 cw(c-272.7,-0.52) -269.55,0.215 -189.05,0.215 cw(c-185.9,-0.52) -182.75,0.215 -102.25,0.215 cw(c-99.1,-0.52) -95.95,0.215 -15.45,0.215 cw(c-12.3,-0.52) -9.15,0.215 -2.15,0.215 ccw(c-2.15,2.215) -0.15,2.215 -0.15,36.576 -0.762,36.576 -4.191,36.576 cw(c-4.191,37.846) -5.461,37.846 cw(c-4.242,37.846) -4.242,39.065 -0.15,39.065 -0.15,92.415 ccw(c-2.15,92.415) -2.15,94.415 -7.15,94.415 ; -24.208,94.415 -13.477,94.415 ccw(c-10.327,95.149) -7.177,94.415
Mechanical 16:
  drawing of 560 lines, arcs and shapes, not listed

## Dimensions
-9.15,0.215 to -2.15,94.415 on bot dimensions
-0.15,92.415 to -284.85,92.415 on bot dimensions
-9.15,0.215 to -7.177,94.415 on top dimensions
-0.15,92.415 to -284.85,92.415 on top dimensions